# EAGLE board proc (EAGLE 7.5.0)
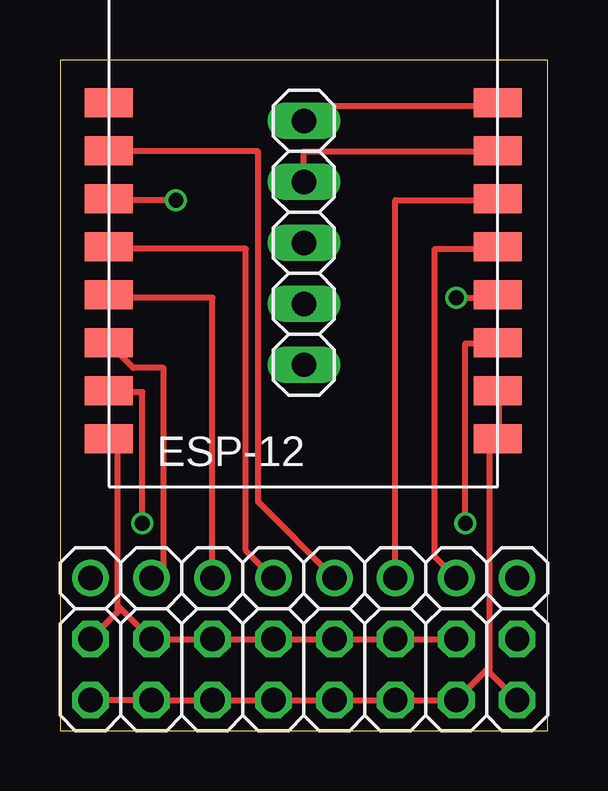
[diagram p0: board, top side]
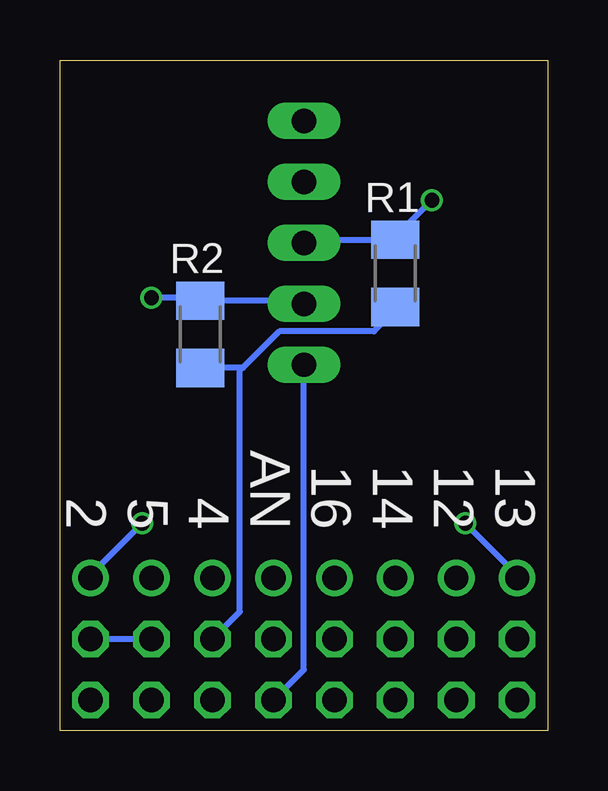
[diagram p1: board, bottom side, seen from below]

Size 20.32 x 27.94 mm. Coordinates in mm from the lower left corner, seen from the top.
Outline: 0,0 20.32,0 20.32,27.94 0,27.94 0,0
Copper layers (1*16): Top 0.035mm / dielectric 1.5mm / Bottom 0.035mm
Design rules "SeeedStudio_2layer_DRU_no_angle_20140221": minimum track width 6mil, minimum drill 12mil, track to track 6mil, track to pad 6mil, pad to pad 6mil, via to via 6mil, smd to smd 0mil, copper to edge 10mil, drill to drill 10mil, minimum pad ring 10mil, minimum via ring 6mil, stop-mask expansion 2mil, vias tented up to drill 100mil, thermal gap 10mil

## Footprints (pad centres in the part's own frame; a part is rotated, then mirrored left to right if it is on the bottom)
ESP8266-ESP12 = smd 2 x 1.2: 1 16.2,2; 2 16.2,4; 3 16.2,6; 4 16.2,8; 5 16.2,10; 6 16.2,12; 7 16.2,14; 8 16.2,16; 9 0,16; 10 0,14; 11 0,12; 12 0,10; 13 0,8; 14 0,6; 15 0,4; 16 0,2
1X08 = drill 1.016: 1 -8.89,0; 2 -6.35,0; 3 -3.81,0; 4 -1.27,0; 5 1.27,0; 6 3.81,0; 7 6.35,0; 8 8.89,0
1X05 = drill 1.016 long: 1 -5.08,0; 2 -2.54,0; 3 0,0; 4 2.54,0; 5 5.08,0
2X08 = drill 1.016 octagon: 1 -8.89,-1.27; 2 -8.89,1.27; 3 -6.35,-1.27; 4 -6.35,1.27; 5 -3.81,-1.27; 6 -3.81,1.27; 7 -1.27,-1.27; 8 -1.27,1.27; 9 1.27,-1.27; 10 1.27,1.27; 11 3.81,-1.27; 12 3.81,1.27; 13 6.35,-1.27; 14 6.35,1.27; 15 8.89,-1.27; 16 8.89,1.27
M1206 = smd 1.6 x 2: 1 -1.4,0; 2 1.4,0

## Placement (x,y rotation side)
ESP-12  ESP8266_ESP-12  [ESP8266-ESP12]  2.03,10.16 0 top
IN_OUT  [1X08]  10.16,6.35 0 top
PROG  [1X05]  10.16,20.32 270 top
PWR_BUS  [2X08]  10.16,2.54 180 top
R1  10k  [M1206]  6.35,19.05 270 bottom
R2  10k  [M1206]  14.48,16.51 270 bottom

## Library data of the parts
ESP-12 = ESP8266-ESP12
IN_OUT PROG PWR_BUS = pinhead
R1 R2 = rcl

## Nets
ADC: ESP-12.10 IN_OUT.5
CH_PD: ESP-12.11 PROG.3 R1.1
GND: ESP-12.1 ESP-12.2 PROG.5 PWR_BUS.2 PWR_BUS.4 PWR_BUS.6 PWR_BUS.8 PWR_BUS.10 PWR_BUS.12 PWR_BUS.14 PWR_BUS.16
GPIO0: ESP-12.4 PROG.4 R2.1
GPIO2: ESP-12.3 IN_OUT.8
GPIO4: ESP-12.6 IN_OUT.6
GPIO5: ESP-12.5 IN_OUT.7
GPIO12: ESP-12.14 IN_OUT.2
GPIO13: ESP-12.15 IN_OUT.1
GPIO14: ESP-12.13 IN_OUT.3
GPIO16: ESP-12.12 IN_OUT.4
RXD: ESP-12.7 PROG.2
TXD: ESP-12.8 PROG.1
VCC: ESP-12.16 PWR_BUS.1 PWR_BUS.3 PWR_BUS.5 PWR_BUS.7 PWR_BUS.9 PWR_BUS.11 PWR_BUS.13 PWR_BUS.15 R1.2 R2.2

## Tracks (layer width: path | path; a pad name or v marks a point on that pad's centre or on a via)
ADC
  Top 0.254: IN_OUT.5 8.26,9.53 8.26,24.13 2.03,24.13 ESP-12.10
CH_PD  (via drill 0.61)
  Top 0.254: v4.83,22.1 2.03,22.1 ESP-12.11
  Bottom 0.254: PROG.3 10.03,20.45 R1.1 6.35,20.57 v4.83,22.1
GND
  Top 0.254: ESP-12.2 18.29,14.1 18.29,12.19 ESP-12.1 18.16,12.06 17.91,11.81 17.91,2.67 | 17.91,2.67 17.91,2.41 PWR_BUS.2 | 17.91,2.67 PWR_BUS.4 PWR_BUS.6 PWR_BUS.8 PWR_BUS.10 PWR_BUS.12 PWR_BUS.14 PWR_BUS.16
  Bottom 0.254: PROG.5 10.16,2.54 PWR_BUS.8
GPIO0  (via drill 0.61)
  Top 0.254: v16.51,18.03 18.16,18.03 ESP-12.4
  Bottom 0.254: PROG.4 10.29,17.91 R2.1 14.48,18.03 v16.51,18.03
GPIO2  (via drill 0.61)
  Top 0.254: v16.89,8.64 16.89,16.13 18.16,16.13 ESP-12.3
  Bottom 0.254: v16.89,8.64 19.05,6.48 IN_OUT.8
GPIO4
  Top 0.254: IN_OUT.6 13.97,22.1 18.16,22.1 ESP-12.6
GPIO5
  Top 0.254: IN_OUT.7 15.62,7.24 15.62,20.07 18.16,20.07 ESP-12.5
GPIO12
  Top 0.254: IN_OUT.2 4.32,6.86 4.32,15.11 3.05,15.11 2.03,16.13 ESP-12.14
GPIO13  (via drill 0.61)
  Top 0.254: v3.43,8.64 3.43,14.1 2.03,14.1 ESP-12.15
  Bottom 0.254: v3.43,8.64 1.27,6.48 IN_OUT.1
GPIO14
  Top 0.254: IN_OUT.3 6.35,18.03 2.03,18.03 ESP-12.13
GPIO16
  Top 0.254: IN_OUT.4 7.75,7.49 7.75,20.07 2.03,20.07 ESP-12.12
RXD
  Top 0.254: PROG.2 10.16,24.13 18.16,24.13 ESP-12.7
TXD
  Top 0.254: PROG.1 10.16,26.04 18.16,26.04 ESP-12.8
VCC
  Top 0.254: 2.41,5.21 2.41,4.95 PWR_BUS.15 | 2.41,5.21 2.41,11.68 2.03,12.06 ESP-12.16 | 2.41,5.21 PWR_BUS.13 PWR_BUS.11 PWR_BUS.9 PWR_BUS.7 PWR_BUS.5 PWR_BUS.3
  Bottom 0.254: 12.83,15.11 12.7,15.11 11.18,16.64 7.24,16.64 6.35,17.53 R1.2 | 12.83,15.11 R2.2 | PWR_BUS.3 PWR_BUS.1 | 12.83,15.11 12.83,4.95 PWR_BUS.5

## Text on the board
bNames: 13 / 12 / 14 / 16 / AN / 4 / 5 / 2